# Altium PCB ESOP-10_L4.9-W3.9-P1.00-LS6.0-BL-EP_2025-06-25 (1).pcbdoc
Units mm, origin at the board's own origin, x right, y up, seen from the top; angles counter-clockwise.
Board outline 35.05 x 32.97 mm, 2 copper layers (Top Layer, Bottom Layer); 1 components, 0 nets, 11 pads, 0 vias.
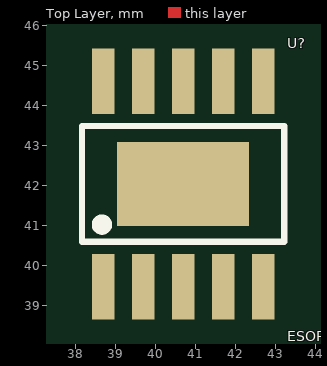
[diagram p0: Top Layer view]
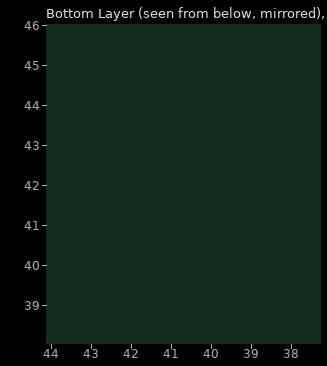
[diagram p1: Bottom Layer view, seen from below]

## Layer stack, top to bottom
Top Layer: signal copper (thickness not stored)
Dielectric: dielectric 0.32, FR-4, Dk 4.8
Bottom Layer: signal copper (thickness not stored)

## Board outline
60.45,25.4 25.4,25.4 25.4,58.374 60.45,58.374

## Components (designator, comment, footprint, x,y, rotation, side; value= is the part's Value field where it differs from the comment)
U? "ESOP-10_L4.9-W3.9-P1.00-LS6.0-BL-EP" ESOP-10_L4.9-W3.9-P1.00-LS6.0-BL-EP 40.702,41.76 r0 top

## Footprints (in the part's own frame and the unit in brackets; to place one, negate y for a bottom-side part, rotate by r counter-clockwise, add the part's x,y. Pads: shape width x height; smd on the part's side, far side on the other; paste and mask are expansions set on the pad)
ESOP-10_L4.9-W3.9-P1.00-LS6.0-BL-EP [mm]
  rect 0.56x1.64 smd paste+0 mask+0.051: 1(-2,-2.3) 2(-1,-2.3) 3(0,-2.3) 4(1,-2.3) 5(2,-2.3) 6(2,2.84) 7(1,2.84) 8(0,2.84) 9(-1,2.84) 10(-2,2.84)
  rect 3.3x2.1 smd paste+0 mask+0.051: 11(0,0.27)
  silkscreen extent -2.53,-1.18 2.53,1.72

## Nets (pads, with @x,y where several pads share a name; then routed paths per layer and width w, separated by ;. In a path a pad name is that pad's centre, name@x,y a point inside that pad or via, vN(x,y) a via of type N, cw(c..) or ccw(c..) an arc to the next point about the centre after c; other vN are vias at no path point)
pads on no net: U?.1 U?.2 U?.3 U?.4 U?.5 U?.6 U?.7 U?.8 U?.9 U?.10 U?.11